# Altium PCB DCDC_POWER_SUPPLY_V2.PcbDoc (part 1 of 3)
Units mm, origin at the board's own origin, x right, y up, seen from the top; angles counter-clockwise.
Board outline 41 x 24.5 mm, 4 copper layers (Top Layer, GND 1, GND 2, Bottom Layer), stack 0.603 mm thick; 49 components, 29 nets, 141 pads, 132 vias.
Unrouted connection lines stored in the file: 1.
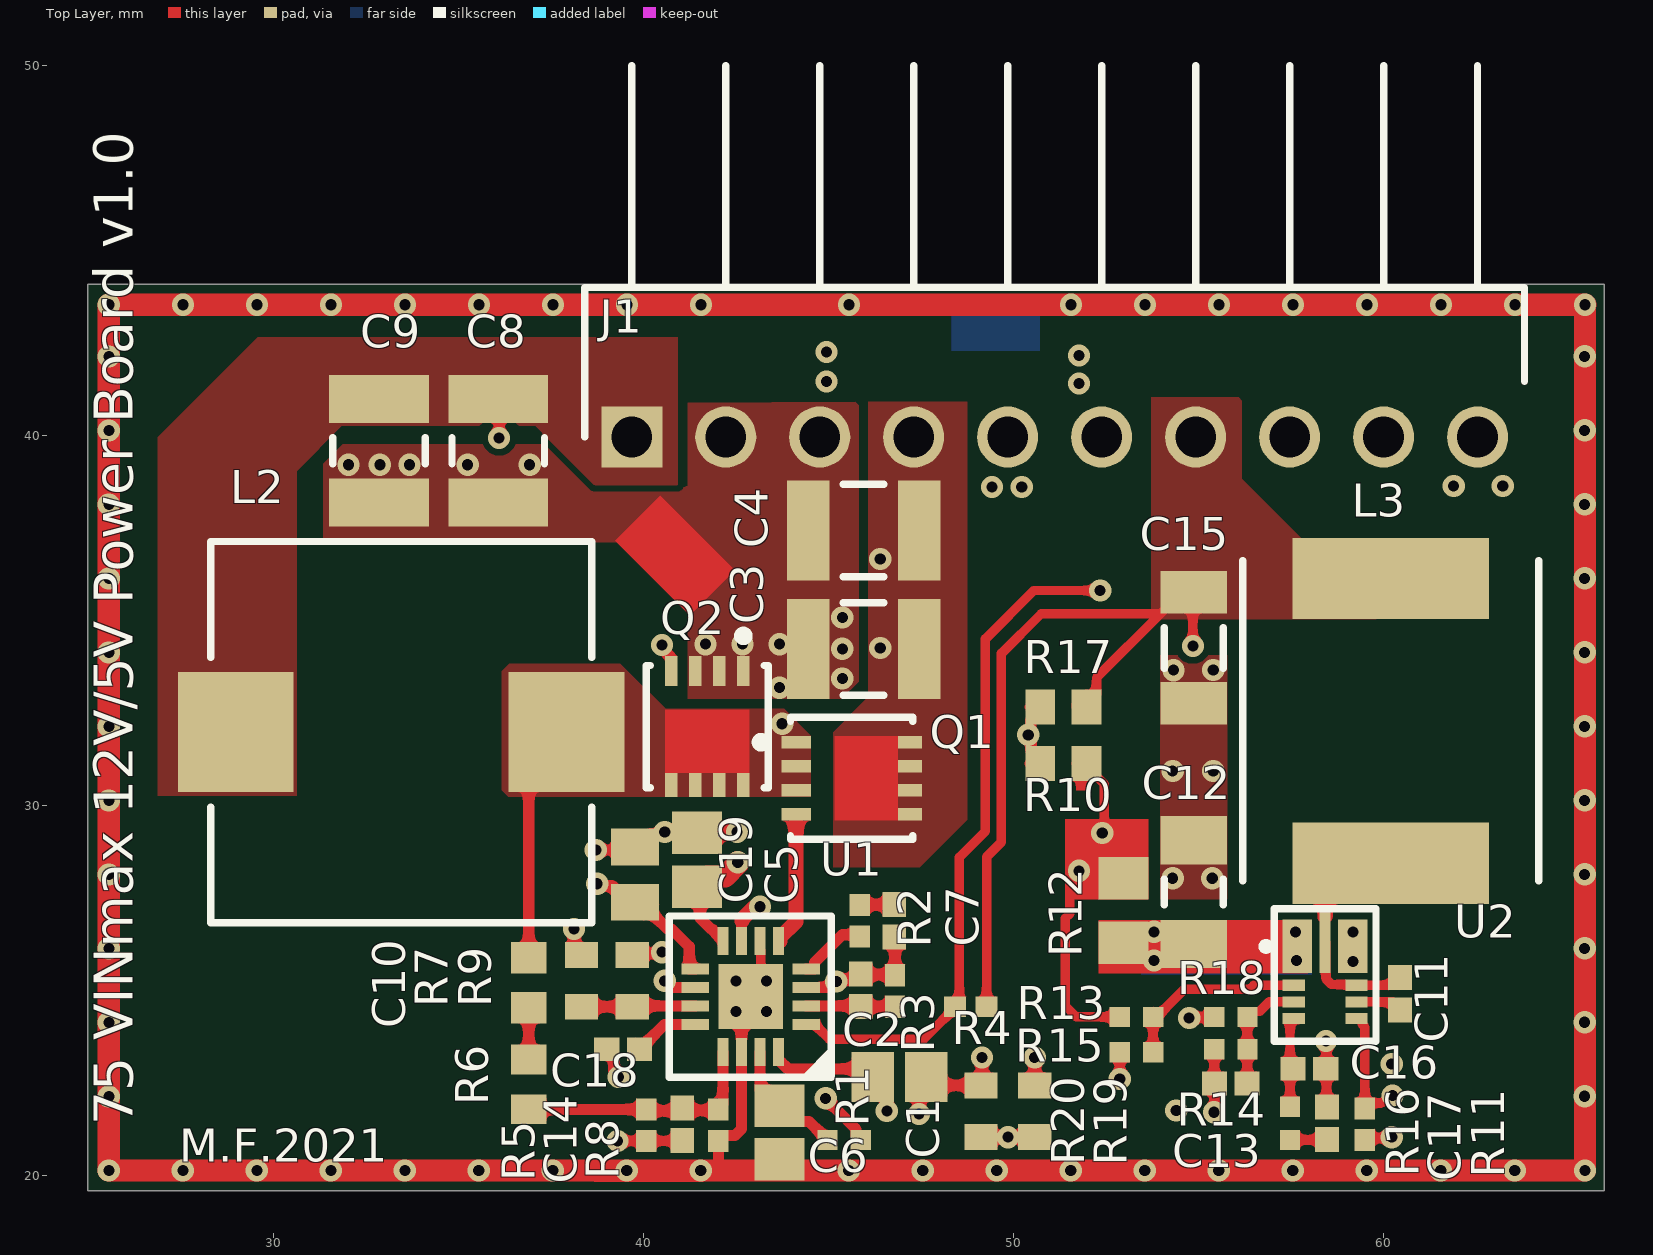
[diagram p0: Top Layer view]
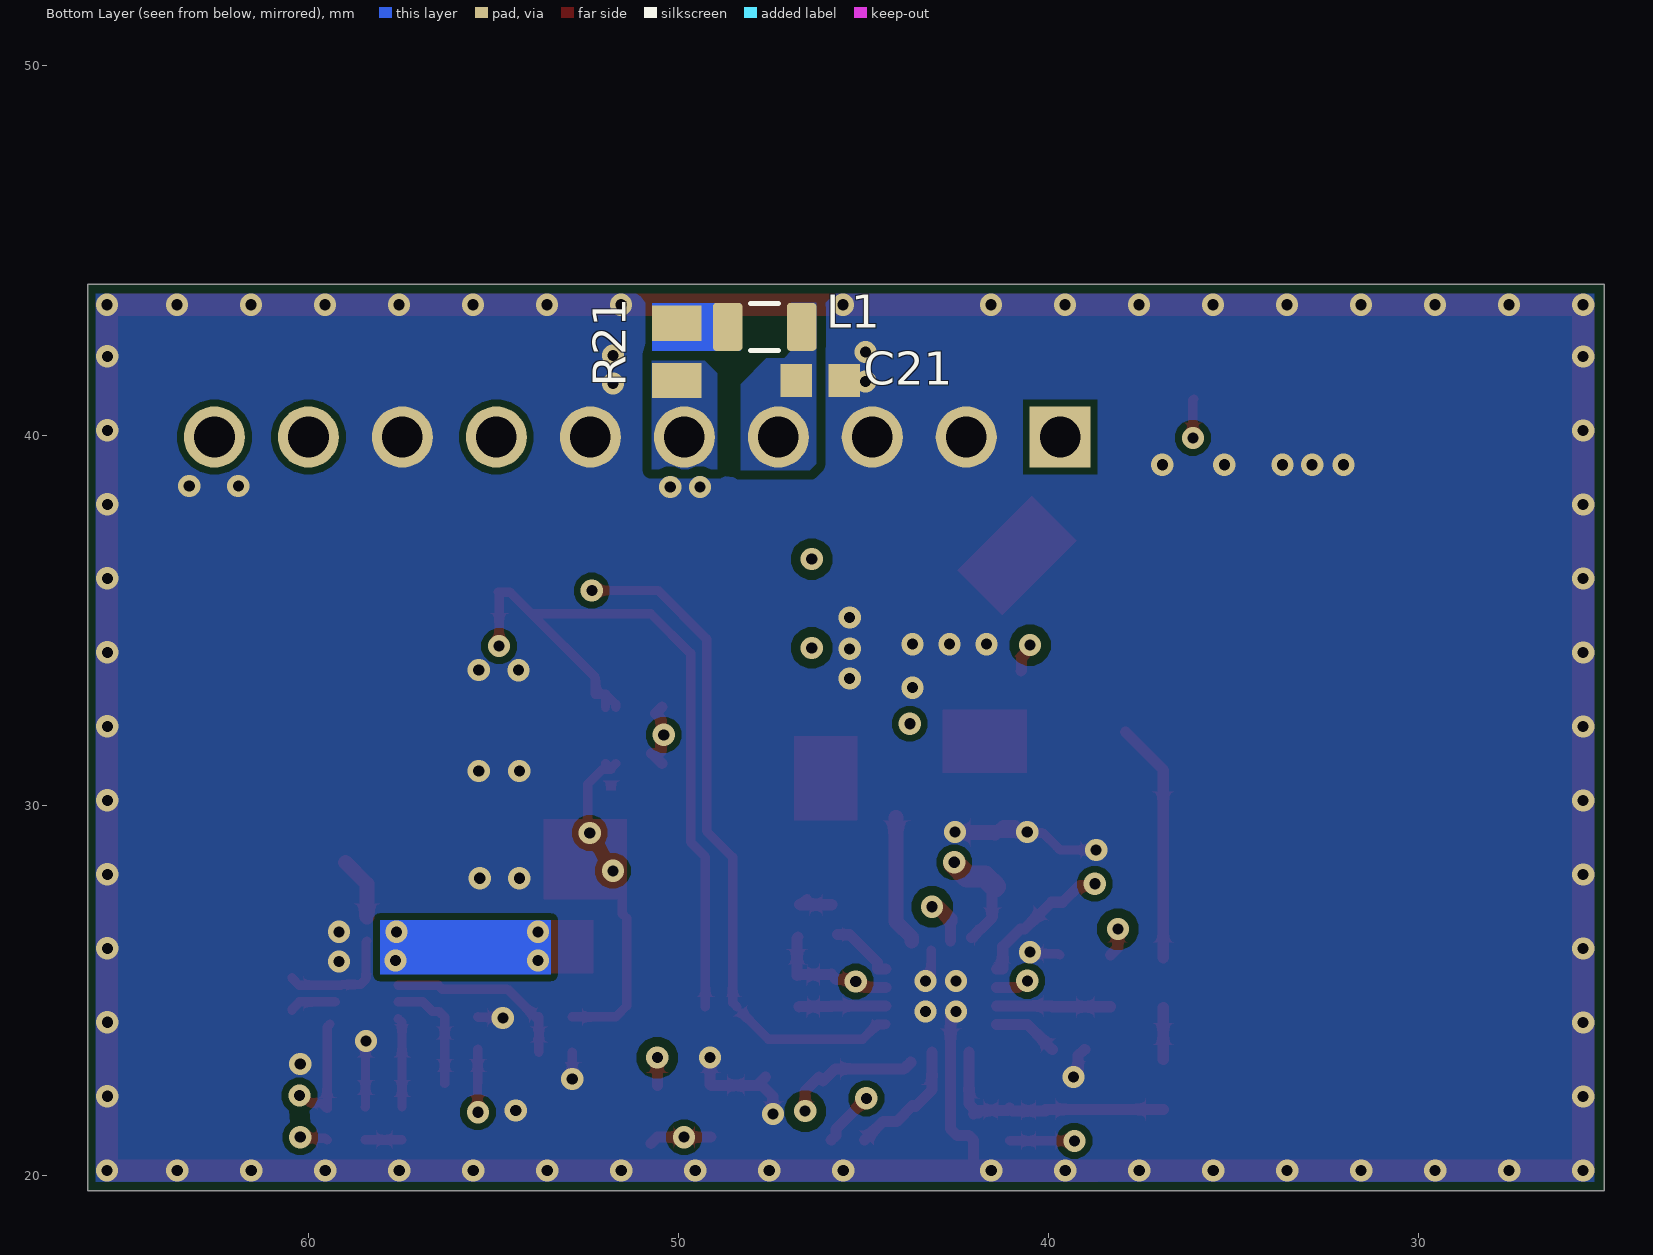
[diagram p1: Bottom Layer view, seen from below]
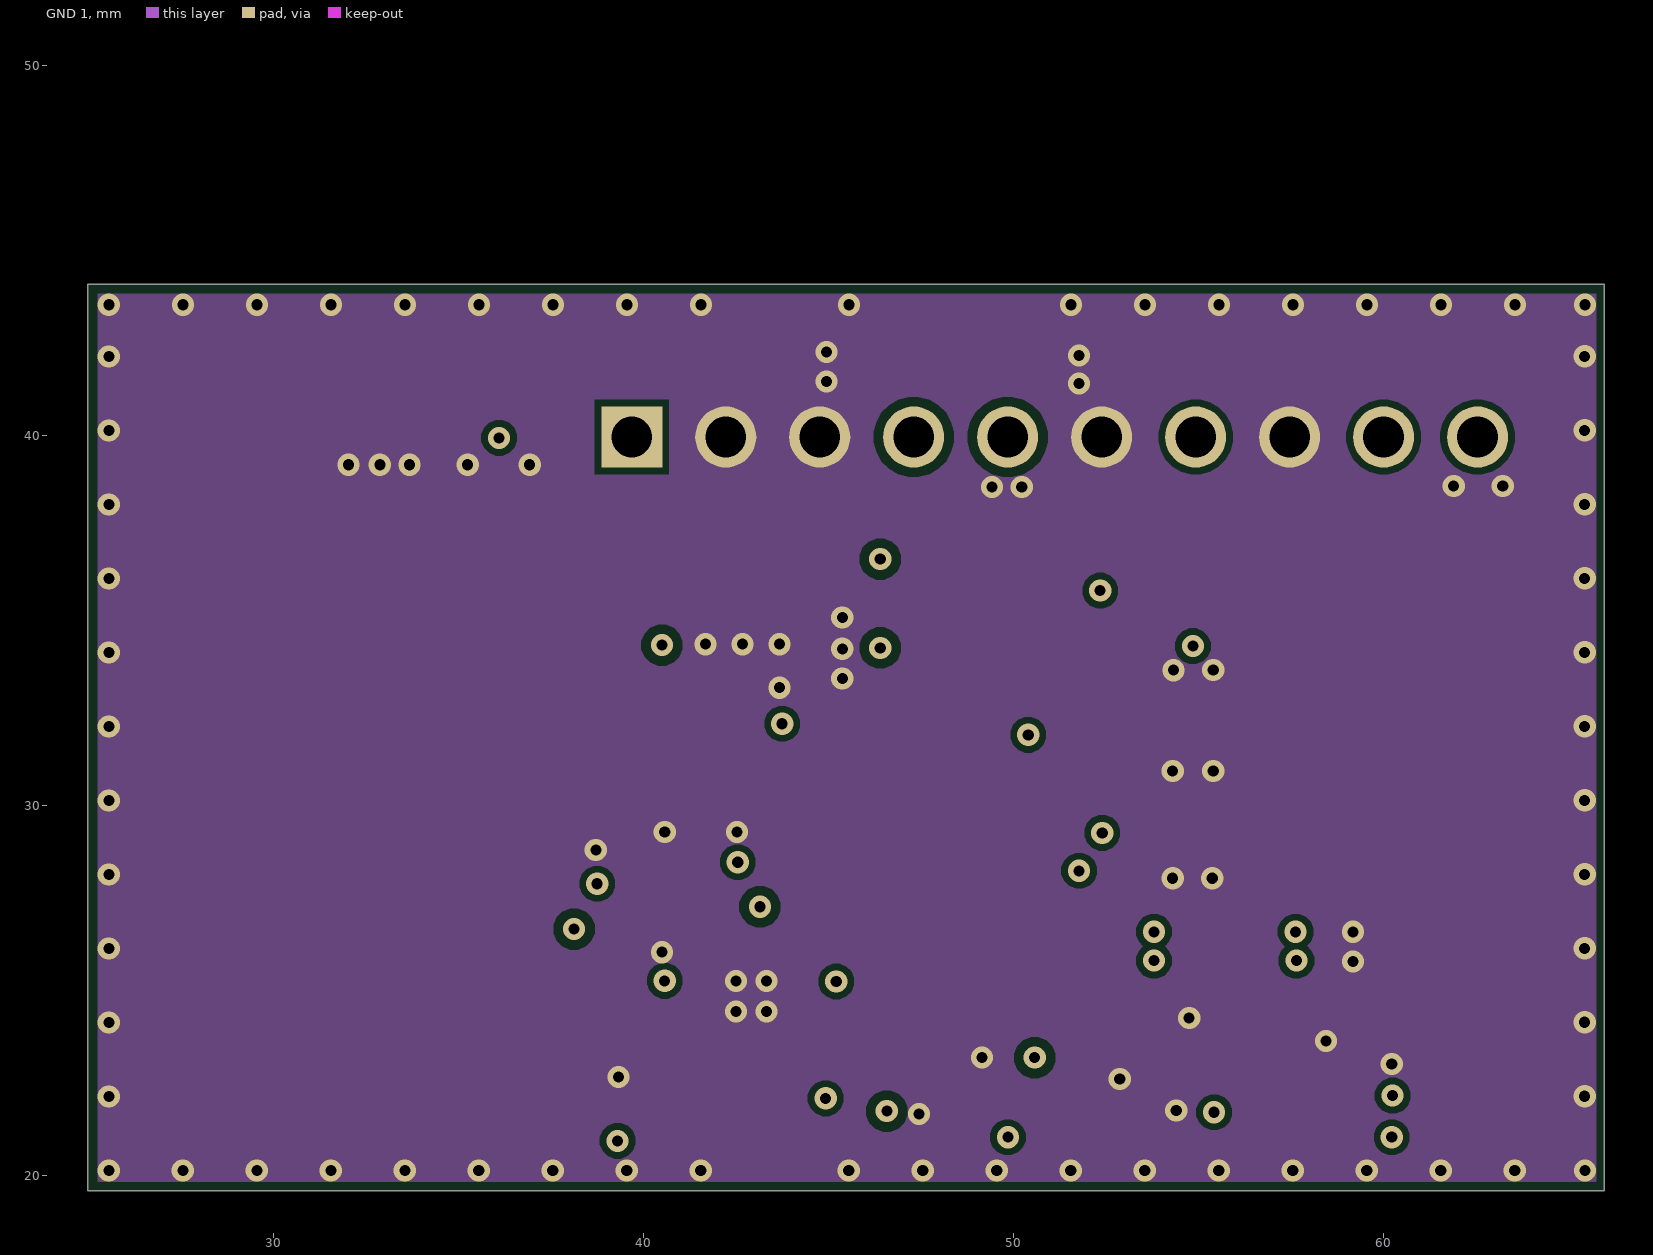
[diagram p2: GND 1]
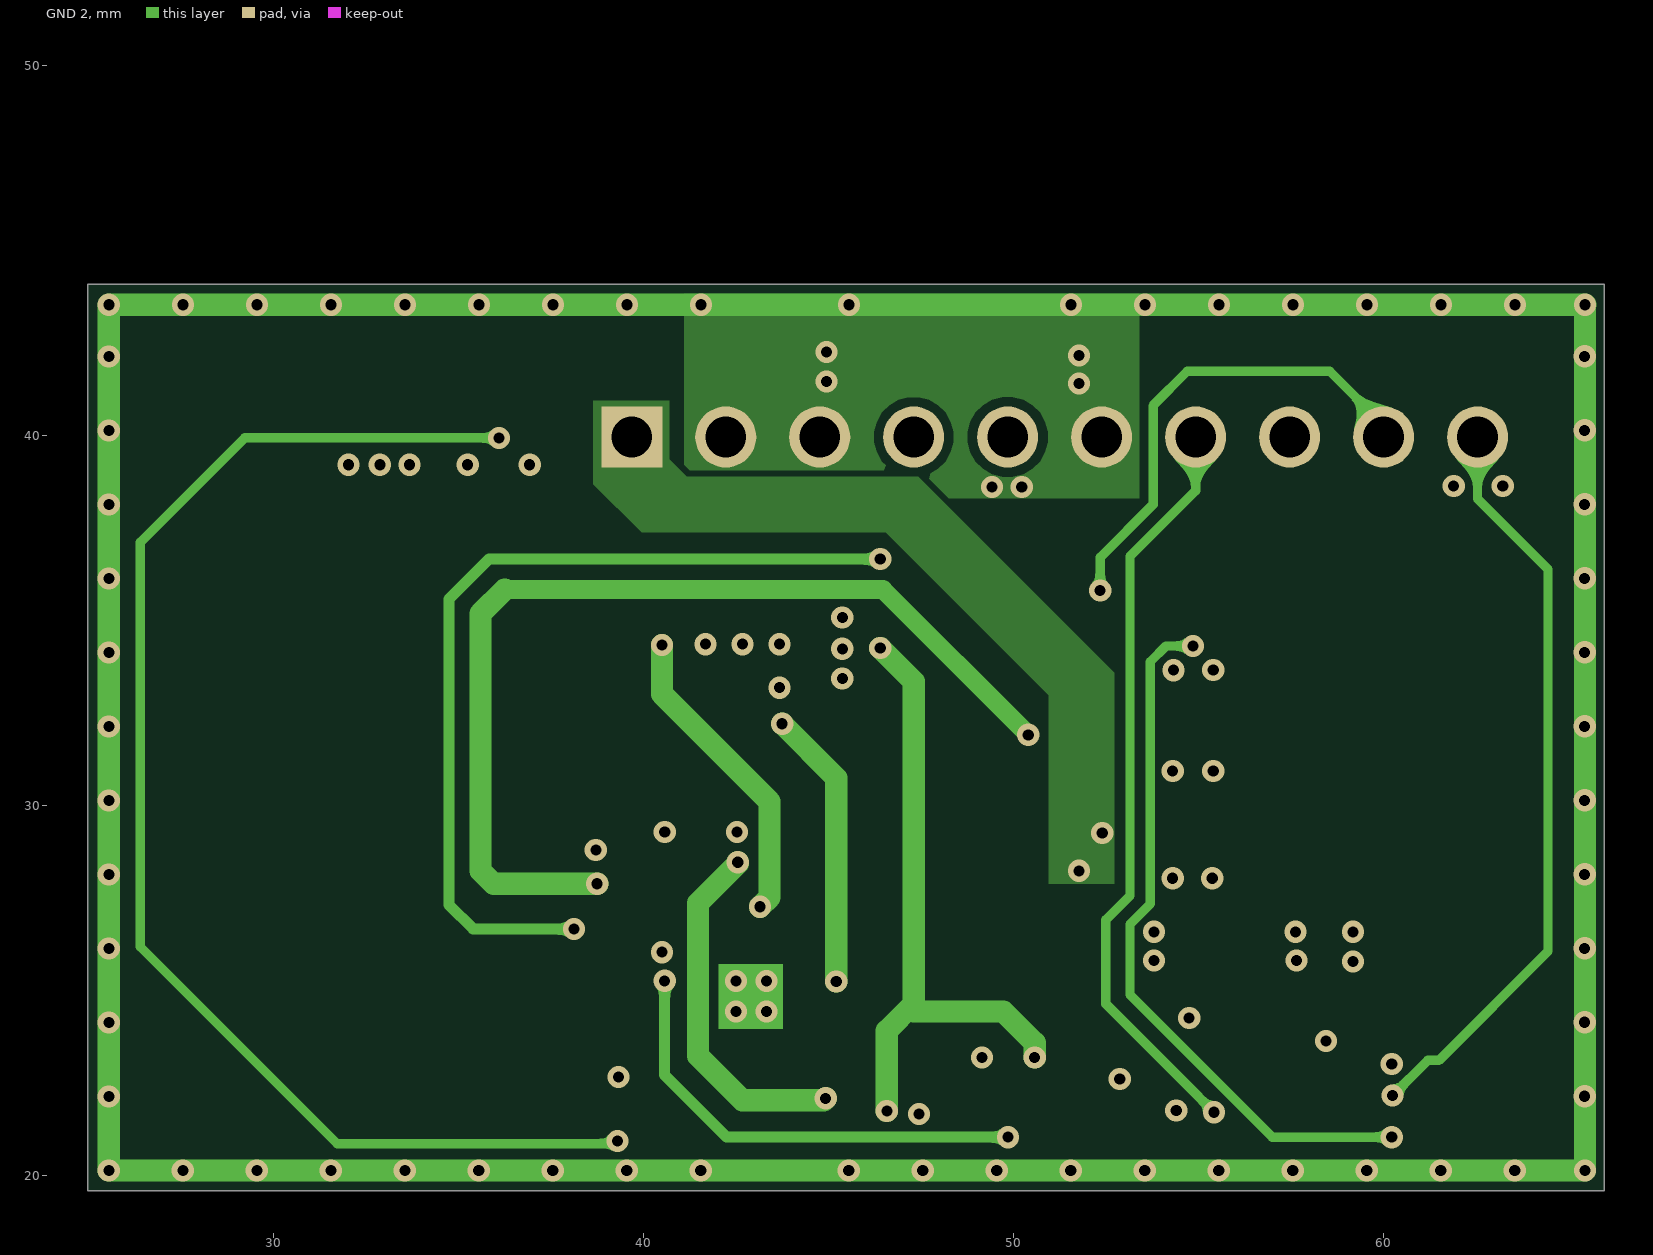
[diagram p3: GND 2]

## Layer stack, top to bottom
Top Solder: solder mask 0.0102, Solder Resist, Dk 3.5
Top Layer: signal copper 0.0356
Dielectric 2: prepreg 0.0711, PP-006, Dk 4.1
GND 1: signal copper 0.035
Dielectric 1: dielectric 0.32, FR-4, Dk 4.8
GND 2: signal copper 0.035
Dielectric 3: prepreg 0.0711, PP-006, Dk 4.1
Bottom Layer: signal copper 0.0356
Bottom Solder: solder mask 0.0102, Solder Resist, Dk 3.5

## Board outline
24.975,19.575 65.975,19.575 65.975,44.075 24.975,44.075

## Design rules (kind name [scope] priority, off if disabled: settings)
Clearance Clearance_2 [All vs InComponent('U2')] p1: gap=0.15 ignorepadtopadclearanceinfootprint=FALSE
Clearance Clearance_1 [(InNet('NetQ1_4') OR InNet('NetQ2_4') OR InNet('V_PV') OR InNet('V_PVin'))] p2: gap=0.254 ignorepadtopadclearanceinfootprint=FALSE except(0.178: Arc-SMDPad Track-SMDPad SMDPad-SMDPad)
Clearance [All] p3: gap=0.178 ignorepadtopadclearanceinfootprint=FALSE
PolygonConnect PolygonConnect_2 [(InNet('V_PVin') AND InNet('V_PV'))] p1: connectstyle=Direct reliefconductorwidth=0.254 reliefentries=4 polygonreliefangle="90 Angle" airgapwidth=0.254
PolygonConnect [All] p2: connectstyle=Direct reliefconductorwidth=0.254 reliefentries=4 polygonreliefangle="90 Angle" airgapwidth=0.254
PolygonConnect PolygonConnect_1 [OnBottomLayer] p3: thpad.connectstyle=Relief thpad.reliefconductorwidth=0.254 thpad.reliefentries=4 thpad.polygonreliefangle="90 Angle" thpad.airgapwidth=0.254 smdpad.connectstyle=Direct smdpad.reliefconductorwidth=0.254 smdpad.reliefentries=4 smdpad.polygonreliefangle="90 Angle" smdpad.airgapwidth=0.254 via.connectstyle=Direct via.reliefconductorwidth=0.254 via.reliefentries=4 via.polygonreliefangle="90 Angle" via.airgapwidth=0.254
RoutingVias [All] p1: holewidth=0.711 width=1.27 viastyle="Through Hole" minholewidth=0.3 minwidth=0.6 maxholewidth=0.711 maxwidth=1.27
SolderMaskExpansion [All] p1: expansion=0.06 istentingtop=FALSE
Width [All] p1: maxlimit=5 minlimit=0.2 preferedwidth=0.254
30 further rules are at their usual default settings.

## Classes and differential pairs
component class HV_BUCK_V2: C1 C2 C3 C4 C5 C6 C7 C8 C9 C10 C14 C18 C19 C21 J1 L1 L2 Q1 Q2 R1 R2 R3 R4 R5 R6 R7 R8 R9 R10 R17 R19 R20 R21 U1
component class LV_BUCK: C11 C12 C13 C15 C16 C17 L3 R11 R12 R13 R14 R15 R16 R18 U2

## Components (designator, comment, footprint, x,y, rotation, side; value= is the part's Value field where it differs from the comment)
C1 "10nF" CAPC2013X94X50LL20T25 46.925,22.65 r180 top
C2 "2.2nF" CAPC1005X56X25NL10T15 45.875,25 r270 top
C3 "CAP 2.2uF 100V" CAPC1210(3225)280_N 45.95,34.225 r0 top value=2.2uF
C4 "CAP 2.2uF 100V" CAPC1210(3225)280_N 45.95,37.425 r0 top value=2.2uF
C5 "4.7uF" CAPC2013X152X50LL20T25 41.45,28.525 r270 top
C6 "4.7uF" CAPC2013X152X50LL20T25 43.675,21.15 r90 top
C7 "100nF" CAPC1005X56X25NL10T15 46.775,26.875 r90 top
C8 "22uF" CAPC3225X279X50NL20T25 36.075,39.575 r90 top
C9 "22uF" CAPC3225X279X50NL20T25 32.85,39.575 r90 top
C10 "100nF" CAPC1608X90X35NL10T15 36.9,25.2 r90 top
C11 "100nF" CAPC1005X56X25NL10T15 60.45,24.9 r270 top
C12 "4.7uF" CAPC3216X180X50NL20T25 54.875,27.65 r270 top
C13 "10pF" CAPC1005X56X25NL10T15 55.875,22.475 r180 top
C14 "2.2nF" CAPC1005X56X25NL10T15 41.05,21.375 r270 top
C15 "22uF" CAPC1206(3216)190_N 54.875,34.25 r90 top
C16 "15pF" CAPC1005X56X25NL10T15 58,22.875 r180 top
C17 "10nF" CAPC1005X56X25NL10T15 58.475,21.4 r270 top
C18 "10nF" CAPC1005X56X25NL10T15 39.45,23.4 r0 top
C19 "1uF" CAPC2013X135X45LL10T25 39.775,28.125 r270 top
C21 "3.3nF" CAPC1608X90X35LL15T15 46.175,41.475 r0 bottom
J1 "61301011021" HDRRA10W64P0X254_1X10_2540X254X254P 39.685,39.95 r0 top
L1 "742792641" RESC2012X70N 47.675,42.925 r0 bottom
L2 "100uH" VISH-IHLP4040DZER101M11_V 33.45,31.975 r180 top
L3 "22uH" INDPM8680X400N 60.2,32.275 r90 top
Q1 "IAUZ20N08S5L300" INF-PG-TSDSON-8-1_V 45.625,30.725 r180 top
Q2 "IAUZ20N08S5L300" INF-PG-TSDSON-8-1_V 41.725,32.125 r90 top
R1 "2.2R" RESC1005X40X25NL05T05 45.425,20.95 r0 top
R2 "3R3" RESC1005X40X25NL05T10 45.85,26.875 r270 top
R3 "953R" RESC1005X40X25NL05T10 46.8,24.975 r270 top
R4 "100K" RESC1005X40X25NL05T10 48.85,24.55 r180 top
R5 "19.1K" RESC1005X40X25NL05T10 40.075,21.35 r270 top
R6 "180K" RESC1608X55X30NL15T15 36.9,22.45 r90 top
R7 "100K" RESC1608X55X25NL10T15 38.325,25.25 r270 top
R8 "1K" RESC1005X40X25NL05T10 42.025,21.35 r90 top
R9 "150K" RESC1608X55X25NL10T15 39.7,25.25 r270 top
R10 "2.2R" RESC1609X50X30NL10T20 51.35,31.125 r180 top
R11 "100K" RESC1005X40X25NL05T10 59.5,21.375 r270 top
R12 "4.7R" RESC2013X70X40NL20T20 52.975,27.15 r90 top
R13 "470k" RESC1005X40X25NL05T05 53.325,24.275 r180 top
R14 "158K" RESC1005X40X25NL05T05 55.875,23.4 r180 top
R15 "82k" RESC1005X40X25NL05T05 53.325,23.325 r0 top
R16 "42.2K" RESC1005X40X25NL05T05 57.475,21.4 r90 top
R17 "2.2R" RESC1609X50X30NL10T20 51.35,32.65 r180 top
R18 "30K" RESC1005X40X25NL05T05 55.875,24.275 r0 top
R19 "1M" RESC1608X55X25NL10T15 50.575,21.725 r90 top
R20 "100K" RESC1608X55X25NL10T15 49.125,21.725 r270 top
R21 "0.3R" RESC2013X50X40LL20T20 50.05,42.25 r270 bottom
U1 "MIC2128YML-TR" QFN50P300X300X90-17N 42.9,24.825 r180 top
U2 "AP63357QZV-7" AP63357QZV7 58.425,25.475 r0 top

## Footprints (in the part's own frame and the unit in brackets; to place one, negate y for a bottom-side part, rotate by r counter-clockwise, add the part's x,y. Pads: shape width x height; smd on the part's side, far side on the other; paste and mask are expansions set on the pad)
AP63357QZV7 [mm]
  rect 0.8x1.45 smd: 1(-0.75,0.707) 8(0.75,0.707)
  rect 0.6x0.3 smd: 2(-0.85,-0.344) 3(-0.85,-0.794) 4(-0.85,-1.244) 5(0.85,-1.244) 6(0.85,-0.794) 7(0.85,-0.344)
  rect 0.3x1.725 smd: 9(0,0.844)
  silkscreen extent -1.7,0.61 -1.5,0.81, body extent -1,-1.5 1,1.5, height 0.95
CAPC1005X56X25NL10T15 [mm] "Chip Capacitor, 2-Leads, Body 1.00x0.50mm, IPC Medium Density"
  rect 0.68x0.64 smd: 1(-0.44,0) 2(0.44,0)
  body extent -0.55,-0.3 0.55,0.3, height 0.56
CAPC1206(3216)190_N [mm] "Chip Capacitor, Body 3.2x1.6mm, Height 1.9mm, IPC Medium Density"
  rect 1.15x1.8 smd: 1(-1.5,0) 2(1.5,0)
  silkscreen extent -0.55,-0.8 0.55,0.8, body extent -1.7,-0.9 1.7,0.9, height 1.9
CAPC1210(3225)280_N [mm] "Chip Capacitor, Body 3.2x2.5mm, Height 2.8mm, IPC Medium Density"
  rect 1.15x2.7 smd: 1(-1.5,0) 2(1.5,0)
  silkscreen extent -0.55,-1.25 0.55,1.25, body extent -1.7,-1.4 1.7,1.4, height 2.8
CAPC1608X90X35LL15T15 [mm] "Chip Capacitor, 2-Leads, Body 1.60x0.81mm, IPC High Density"
  rect 0.85x0.9 smd: 1(-0.65,0) 2(0.65,0)
  body extent -0.88,-0.48 0.87,0.48, height 0.9
CAPC1608X90X35NL10T15 [mm] "Chip Capacitor, 2-Leads, Body 1.60x0.80mm, IPC Medium Density"
  rect 0.85x0.95 smd: 1(-0.675,0) 2(0.675,0)
  body extent -0.85,-0.45 0.85,0.45, height 0.9
CAPC2013X94X50LL20T25 [mm] "Chip Capacitor, 2-Leads, Body 2.01x1.25mm, IPC High Density"
  rect 1.15x1.35 smd: 1(-0.725,0) 2(0.725,0)
  body extent -1.1,-0.72 1.1,0.72, height 0.94
CAPC2013X135X45LL10T25 [mm] "Chip Capacitor, 2-Leads, Body 2.00x1.25mm, IPC High Density"
  rect 1x1.3 smd: 1(-0.75,0) 2(0.75,0)
  body extent -1.05,-0.67 1.05,0.68, height 1.35
CAPC2013X152X50LL20T25 [mm] "Chip Capacitor, 2-Leads, Body 2.01x1.25mm, IPC High Density"
  rect 1.15x1.35 smd: 1(-0.725,0) 2(0.725,0)
  body extent -1.1,-0.72 1.1,0.72, height 1.52
CAPC3216X180X50NL20T25 [mm] "Chip Capacitor, 2-Leads, Body 3.40x1.80mm, IPC Medium Density"
  rect 1.3x1.8 smd: 1(-1.4,0) 2(1.4,0)
  silkscreen extent -0.35,-0.8 0.35,0.8, body extent -1.7,-0.9 1.7,0.9, height 1.8
CAPC3225X279X50NL20T25 [mm] "Chip Capacitor, 2-Leads, Body 3.40x2.70mm, IPC Medium Density"
  rect 1.3x2.7 smd: 1(-1.4,0) 2(1.4,0)
  silkscreen extent -0.35,-1.25 0.35,1.25, body extent -1.7,-1.35 1.7,1.35, height 2.79
HDRRA10W64P0X254_1X10_2540X254X254P [mm]
  rect 1.65x1.65 hole 1.1: 1(0,0)
  round 1.65 hole 1.1: 2(2.54,0) 3(5.08,0) 4(7.62,0) 5(10.16,0) 6(12.7,0) 7(15.24,0) 8(17.78,0) 9(20.32,0) 10(22.86,0)
  silkscreen extent -1.27,0 24.13,10.04, body extent -1.27,-0.32 24.13,10.04, height 2.54
INDPM8680X400N [mm]
  rect 2.2x5.3 smd: 1(-3.85,0) 2(3.85,0)
  silkscreen extent -4.33,-4 4.33,4, body extent -4.33,-4 4.33,4, height 4
INF-PG-TSDSON-8-1_V [mm] "TSDSON, 8-Leads, Body 3.3x3.3mm, Pitch 0.65mm"
  rect 0.8x0.34 smd: 1(1.5,-0.975) 2(1.5,-0.325) 3(1.5,0.325) 4(1.5,0.975)
  rect 0.65x0.34 smd: 5(-1.575,0.975) 6(-1.575,0.325) 7(-1.575,-0.325) 8(-1.575,-0.975)
  Top Layer region: -1.25,-1.145 0.46,-1.145 0.46,1.145 -1.25,1.145
  silkscreen extent -1.65,-1.65 2.57,1.65, body extent -1.65,-1.65 1.65,1.65, height 1.1
QFN50P300X300X90-17N [mm]
  rect 0.75x0.3 smd: 1(-1.5,0.75) 2(-1.5,0.25) 3(-1.5,-0.25) 4(-1.5,-0.75) 9(1.5,-0.75) 10(1.5,-0.25) 11(1.5,0.25) 12(1.5,0.75)
  rect 0.3x0.75 smd: 5(-0.75,-1.5) 6(-0.25,-1.5) 7(0.25,-1.5) 8(0.75,-1.5) 13(0.75,1.5) 14(0.25,1.5) 15(-0.25,1.5) 16(-0.75,1.5)
  rect 1.75x1.75 smd: 17(0,0)
  silkscreen extent -2.18,-2.18 2.2,2.18, body extent -1.55,-1.55 1.55,1.55, height 0.9
RESC1005X40X25NL05T05 [mm] "Chip Resistor, 2-Leads, Body 1.00x0.50mm, IPC Medium Density"
  rect 0.55x0.55 smd: 1(-0.45,0) 2(0.45,0)
  body extent -0.53,-0.27 0.53,0.28, height 0.4
RESC1005X40X25NL05T10 [mm] "Chip Resistor, 2-Leads, Body 1.00x0.50mm, IPC Medium Density"
  rect 0.6x0.55 smd: 1(-0.425,0) 2(0.425,0)
  body extent -0.53,-0.27 0.53,0.28, height 0.4
RESC1608X55X25NL10T15 [mm] "Chip Resistor, 2-Leads, Body 1.70x0.90mm, IPC Medium Density"
  rect 0.7x0.9 smd: 1(-0.7,0) 2(0.7,0)
  body extent -0.85,-0.45 0.85,0.45, height 0.55
RESC1608X55X30NL15T15 [mm] "Chip Resistor, 2-Leads, Body 1.60x0.80mm, IPC Medium Density"
  rect 0.8x0.95 smd: 1(-0.675,0) 2(0.675,0)
  body extent -0.87,-0.48 0.87,0.48, height 0.55
RESC1609X50X30NL10T20 [mm] "Chip Resistor, 2-Leads, Body 1.55x0.85mm, IPC Medium Density"
  rect 0.8x0.95 smd: 1(-0.625,0) 2(0.625,0)
  body extent -0.82,-0.48 0.82,0.48, height 0.5
RESC2012X70N [mm] "Chip Resistor, Body 2.0x1.2mm, EIA 0805, IPC Medium Density"
  round 0.254 on Mech15: 0(0,0)
  rrect25% 0.8x1.3 smd: 1(-1,0) 2(1,0)
  Top Layer pour cut-out: -0.725,0.65 -0.525,0.85 0.525,0.85 0.725,0.65 0.725,-0.65 0.525,-0.85 -0.525,-0.85 -0.725,-0.65
  silkscreen extent -0.38,-0.64 0.38,0.64, body extent -1.1,-0.67 1.1,0.68, height 0.69
RESC2013X50X40LL20T20 [mm] "Chip Resistor, 2-Leads, Body 2.00x1.25mm, IPC High Density"
  rect 0.95x1.35 smd: 1(-0.775,0) 2(0.775,0)
  body extent -1.1,-0.72 1.1,0.72, height 0.5
RESC2013X70X40NL20T20 [mm] "Chip Resistor, 2-Leads, Body 2.2x1.35mm, IPC Medium Density"
  rect 1.15x1.35 smd: 1(-0.875,0) 2(0.875,0)
  body extent -1.1,-0.67 1.1,0.67, height 0.7
VISH-IHLP4040DZER101M11_V [mm] "Molded Inductor, 2-Leads, Body 10.30x10.30mm"
  rect 3.124x3.251 smd: 1(-4.47,0) 2(4.471,0)
  silkscreen extent -5.15,-5.15 5.15,5.15, body extent -5.37,-5.15 5.37,5.15, height 4

## Part data
C1: library part CMP-2007-04169-1, "Cap Ceramic 0.01uF 100V X7R 10% SMD 0805 FlexiTerm 125C Paper T/R", Case Code (Imperial)=0805, Case Code (Metric)=2012, Dielectric=X7R, Manufacturer="AVX Interconnect / Elco", Manufacturer Part Number=08051C103KAZ2A, Max Operating Temperature=125°C, Min Operating Temperature=-55°C, Package Quantity=1, Supplier Part Number 1=478-3559-1-ND, Temperature coefficient=30ppm/°C, Tolerance=10%, Voltage=100V, Capacitance=10nF, Case/Package=0805, Category="Ceramic Capacitors", ComponentLink1Description=https://datasheet.ciiva.com/26904/getdatasheetpartid-136837-26904192.pdf?src-supplier=Verical, ComponentLink1URL=https://datasheet.ciiva.com/26904/getdatasheetpartid-136837-26904192.pdf?src-supplier=Verical, ComponentLink2Description=https://datasheet.ciiva.com/11787/0900766b80dc2409-11787665.pdf?src-supplier=RSComponents, ComponentLink2URL=https://datasheet.ciiva.com/11787/0900766b80dc2409-11787665.pdf?src-supplier=RSComponents, ComponentLink3Description=https://datasheet.ciiva.com/151/flexiterm-151492.pdf?src-supplier=Digi-Key, ComponentLink3URL=https://datasheet.ciiva.com/151/flexiterm-151492.pdf?src-supplier=Digi-Key, ComponentLink4Description=https://datasheet.ciiva.com/151/flexiterm-151493.pdf?src-supplier=Digi-Key, ComponentLink4URL=https://datasheet.ciiva.com/151/flexiterm-151493.pdf?src-supplier=Digi-Key, ComponentLink5Description=https://datasheet.ciiva.com/16326/cx7r-16326741.pdf?src-supplier=Future+Electronics, ComponentLink5URL=https://datasheet.ciiva.com/16326/cx7r-16326741.pdf?src-supplier=Future+Electronics, ComponentLink6Description=https://datasheet.ciiva.com/151/flexiterm-151494.pdf?src-supplier=Digi-Key, ComponentLink6URL=https://datasheet.ciiva.com/151/flexiterm-151494.pdf?src-supplier=Digi-Key, ComponentLink7Description=https://datasheet.ciiva.com/16625/flexiterm-16625227.pdf?src-supplier=Avnet+Europe, ComponentLink7URL=https://datasheet.ciiva.com/16625/flexiterm-16625227.pdf?src-supplier=Avnet+Europe, ComponentLink8Description=https://datasheet.ciiva.com/11508/flexiterm-11508220.pdf?src-supplier=Avnet, ComponentLink8URL=https://datasheet.ciiva.com/11508/flexiterm-11508220.pdf?src-supplier=Avnet, ComponentLink9Description=https://datasheet.ciiva.com/5416/cx7r-218113-5416686.pdf?src-supplier=Mouser, ComponentLink9URL=https://datasheet.ciiva.com/5416/cx7r-218113-5416686.pdf?src-supplier=Mouser, Construction=Flat, Depth=1.25mm, Dissipation Factor=2.5%, Features="Soft Termination", Height=0.94mm, Lead Free="Lead Free", Length=2.01mm, Mount="Surface Mount", Number of Pins=2, Packaging="Tape and Reel", Part Number=08051C103KAZ2A, Pricing 1="1=0.27000, 10=0.18200, 50=0.10880, 100=0.09200, 500=0.06292, 1000=0.05566 (USD)", Radiation Hardening=No, REACH SVHC="No SVHC", RoHS=Yes, RoHS Compliant=Yes, Series=FLEXITERM®, Stock 1=40, Supplier 1=Digi-Key, Termination=SMD/SMT, Thickness=0.037inch, Voltage Rating=100V, Voltage Rating (DC)=100V, Width=0.049inch
C2 C14: library part CMP-2008-02907-1, Case Code (Imperial)=0402, Case Code (Metric)=1005, Dielectric=X7R, Dielectric Material=Ceramic, Insulation Resistance=100GR, Manufacturer="AVX Interconnect / Elco", Manufacturer Part Number=04025C222JAT2A, Max Operating Temperature=125°C, Min Operating Temperature=-55°C, Package Quantity=1, Supplier Part Number 1=478-5131-1-ND, Tolerance=5%, Voltage=50V, Capacitance=2.2nF, Case/Package=0402, Category="Ceramic Capacitors", ComponentLink1Description=https://datasheet.ciiva.com/1123/1679506-1123714.pdf?src-supplier=Element14, ComponentLink1URL=https://datasheet.ciiva.com/1123/1679506-1123714.pdf?src-supplier=Element14, ComponentLink2Description=https://datasheet.ciiva.com/152/cx7r-152323.pdf?src-supplier=Digi-Key, ComponentLink2URL=https://datasheet.ciiva.com/152/cx7r-152323.pdf?src-supplier=Digi-Key, ComponentLink3Description=https://datasheet.ciiva.com/1123/1679506-1123715.pdf?src-supplier=Element14, ComponentLink3URL=https://datasheet.ciiva.com/1123/1679506-1123715.pdf?src-supplier=Element14, ComponentLink4Description=https://datasheet.ciiva.com/152/cx7r-152324.pdf?src-supplier=Digi-Key, ComponentLink4URL=https://datasheet.ciiva.com/152/cx7r-152324.pdf?src-supplier=Digi-Key, ComponentLink5Description=https://datasheet.ciiva.com/152/cx7r-152325.pdf?src-supplier=Digi-Key, ComponentLink5URL=https://datasheet.ciiva.com/152/cx7r-152325.pdf?src-supplier=Digi-Key, ComponentLink6Description=https://datasheet.ciiva.com/7709/1679506-7709551.pdf?src-supplier=Element14, ComponentLink6URL=https://datasheet.ciiva.com/7709/1679506-7709551.pdf?src-supplier=Element14, Contact Plating=Tin,Matte, Depth=0.5mm, Dissipation Factor=10%, Height=0.56mm, Lead Free="Lead Free", Length=1mm, Mount="Surface Mount,PCB", Packaging="Tape and Reel", Part Number=04025C222JAT2A, Pricing 1="1=0.38000, 10=0.26200, 50=0.17480, 100=0.14860, 500=0.10488, 1000=0.09177, 2500=0.08740, 5000=0.08084 (USD)", Radiation Hardening=No, REACH SVHC="No SVHC", RoHS=Yes, RoHS Compliant=Yes, Stock 1=9857, Supplier 1=Digi-Key, Termination=SMD/SMT, Thickness=0.022inch, Voltage Rating=50V, Voltage Rating (DC)=50V, Width=0.02inch
C3 C4: library part CMP-1038-02104-1, "CAP 2.2uF 100V ±10% 1210 (3225 Metric) Thickness 2.8mm SMD", Case-EIA=1210, Case-Metric=3225, Rated Voltage="100 V", Tolerance=Â±10%, Max Thickness="2.8 mm", Technology=SMT
C5 C6: library part CMP-2007-04518-1, "Cap Ceramic 4.7uF 16V X7R 10% SMD 0805 125C Embossed T/R", Case Code (Imperial)=0805, Case Code (Metric)=2012, Dielectric=X7R, Manufacturer="AVX Interconnect / Elco", Manufacturer Part Number=0805YC475KAT2A, Max Operating Temperature=125°C, Min Operating Temperature=-55°C, Package Quantity=1, Supplier Part Number 1=478-5722-1-ND, Tolerance=10%, Voltage=10V, Voltage Rating=16V, Capacitance=4.7uF, Case/Package=0805, Category="Ceramic Capacitors", ComponentLink1Description=https://datasheet.ciiva.com/11787/0900766b80dc2409-11787157.pdf?src-supplier=RSComponents, ComponentLink1URL=https://datasheet.ciiva.com/11787/0900766b80dc2409-11787157.pdf?src-supplier=RSComponents, ComponentLink2Description=https://datasheet.ciiva.com/154/cx7r-154080.pdf?src-supplier=Digi-Key, ComponentLink2URL=https://datasheet.ciiva.com/154/cx7r-154080.pdf?src-supplier=Digi-Key, ComponentLink3Description=https://datasheet.ciiva.com/154/cx7r-154081.pdf?src-supplier=Digi-Key, ComponentLink3URL=https://datasheet.ciiva.com/154/cx7r-154081.pdf?src-supplier=Digi-Key, ComponentLink4Description=https://datasheet.ciiva.com/7812/cx7r-7812213.pdf?src-supplier=Element14, ComponentLink4URL=https://datasheet.ciiva.com/7812/cx7r-7812213.pdf?src-supplier=Element14, ComponentLink5Description=https://datasheet.ciiva.com/7812/cx7r-7812214.pdf?src-supplier=Element14, ComponentLink5URL=https://datasheet.ciiva.com/7812/cx7r-7812214.pdf?src-supplier=Element14, ComponentLink6Description=https://datasheet.ciiva.com/5414/cx7r-218113-5414810.pdf?src-supplier=Mouser, ComponentLink6URL=https://datasheet.ciiva.com/5414/cx7r-218113-5414810.pdf?src-supplier=Mouser, ComponentLink7Description=https://datasheet.ciiva.com/2988/cx7r-2988060.pdf?src-supplier=Avnet, ComponentLink7URL=https://datasheet.ciiva.com/2988/cx7r-2988060.pdf?src-supplier=Avnet, ComponentLink8Description=https://datasheet.ciiva.com/16389/cx7r-16389021.pdf?src-supplier=Future+Electronics, ComponentLink8URL=https://datasheet.ciiva.com/16389/cx7r-16389021.pdf?src-supplier=Future+Electronics, ComponentLink9Description=https://datasheet.ciiva.com/154/cx7r-154079.pdf?src-supplier=Digi-Key, ComponentLink9URL=https://datasheet.ciiva.com/154/cx7r-154079.pdf?src-supplier=Digi-Key, ComponentLink10Description=https://datasheet.ciiva.com/11570/cx7r-11570847.pdf?src-supplier=Avnet, ComponentLink10URL=https://datasheet.ciiva.com/11570/cx7r-11570847.pdf?src-supplier=Avnet, Construction=Flat, Contact Plating=Tin,Matte, Depth=1.25mm, Dissipation Factor=3.5%, Height=1.52mm, Lead Free="Lead Free", Length=2.01mm, Mount="Surface Mount", Number of Pins=2, Packaging="Tape and Reel", Part Number=0805YC475KAT2A, Pricing 1="1=0.48000, 10=0.33000, 50=0.23100, 100=0.19800, 500=0.14850, 1000=0.12540 (USD)", Radiation Hardening=No, REACH SVHC="No SVHC", RoHS=Yes, RoHS Compliant=Yes, Series=-, Stock 1=86922, Supplier 1=Digi-Key, Termination=SMD/SMT, Thickness=0.06inch, Voltage Rating (DC)=16V, Width=0.049inch
C7 C11: library part CMP-2008-02800-1, "AVX 0.1uF Multilayer Ceramic Capacitor (MLCC) 16 V dc 10% X7R dielectric 402 SMT max op. temp. +125C", Case Code (Imperial)=0402, Case Code (Metric)=1005, Dielectric=X7R, Dielectric Material=Ceramic, Manufacturer="AVX Interconnect / Elco", Manufacturer Part Number=0402YC104KAT2A, Max Operating Temperature=125°C, Min Operating Temperature=-55°C, Package Quantity=1, Supplier Part Number 1=478-7888-1-ND, Tolerance=10%, Voltage=16V, Capacitance=100nF, Case/Package=0402, Category="Ceramic Capacitors", ComponentLink1Description=https://datasheet.ciiva.com/1123/1679506-1123956.pdf?src-supplier=Element14, ComponentLink1URL=https://datasheet.ciiva.com/1123/1679506-1123956.pdf?src-supplier=Element14, ComponentLink2Description=https://datasheet.ciiva.com/7614/cx7r-7614662.pdf?src-supplier=Digi-Key, ComponentLink2URL=https://datasheet.ciiva.com/7614/cx7r-7614662.pdf?src-supplier=Digi-Key, ComponentLink3Description=https://datasheet.ciiva.com/22693/1679506-22693578.pdf?src-supplier=Element14, ComponentLink3URL=https://datasheet.ciiva.com/22693/1679506-22693578.pdf?src-supplier=Element14, ComponentLink4Description=https://datasheet.ciiva.com/16623/cx7r-16623291.pdf?src-supplier=Avnet+Europe, ComponentLink4URL=https://datasheet.ciiva.com/16623/cx7r-16623291.pdf?src-supplier=Avnet+Europe, ComponentLink5Description=https://datasheet.ciiva.com/2987/cx7r-2987708.pdf?src-supplier=Avnet, ComponentLink5URL=https://datasheet.ciiva.com/2987/cx7r-2987708.pdf?src-supplier=Avnet, ComponentLink6Description=https://datasheet.ciiva.com/6265/cx7r-6265276.pdf?src-supplier=Digi-Key, ComponentLink6URL=https://datasheet.ciiva.com/6265/cx7r-6265276.pdf?src-supplier=Digi-Key, ComponentLink7Description=https://datasheet.ciiva.com/28613/1679506-28613260.pdf?src-supplier=Element14, ComponentLink7URL=https://datasheet.ciiva.com/28613/1679506-28613260.pdf?src-supplier=Element14, ComponentLink8Description=https://datasheet.ciiva.com/5411/cx7r-218113-5411197.pdf?src-supplier=Mouser, ComponentLink8URL=https://datasheet.ciiva.com/5411/cx7r-218113-5411197.pdf?src-supplier=Mouser, ComponentLink9Description=https://datasheet.ciiva.com/7709/1679506-7709566.pdf?src-supplier=Element14, ComponentLink9URL=https://datasheet.ciiva.com/7709/1679506-7709566.pdf?src-supplier=Element14, Construction=Flat, Contact Plating=Tin,Matte, Depth=0.5mm, Height=0.56mm, Lead Free="Lead Free", Length=1mm, Mount="Surface Mount,PCB", Packaging="Tape and Reel", Part Number=0402YC104KAT2A, Pricing 1="1=0.10000, 10=0.01600, 50=0.00860, 100=0.00700, 500=0.00500, 1000=0.00393, 2500=0.00358, 5000=0.00329 (USD)", Radiation Hardening=No, REACH SVHC=Unknown, RoHS=Yes, RoHS Compliant=Yes, Series=-, Stock 1=72315, Supplier 1=Digi-Key, Termination=SMD/SMT, Thickness=0.022inch, Voltage Rating=16V, Voltage Rating (DC)=16V, Width=0.02inch
C8 C9: library part CMP-2000-05478-1, "Ceramic Capacitor, 25 V, 22 uF, +/-10%, -55 to 85 degC, 2-Pin SMD (1210), RoHS, Tape and Reel", Case Code - in=1210, Case Code - mm=3225, Case Height=2.79mm, Case Length=3.2mm, Case Width=2.5mm, Dielectric=X5R, Manufacturer=AVX, Maximum Operating Temperature=+85C, Minimum Operating Temperature=-55C, Operating Temperature Range=-55Cto+85C, Package / Case=1210(3225metric), Package Description="2-Pin Surface Mount Device, Body 3.2 x 2.5 mm", Temperature Coefficient / Code=+/-15%, Tolerance=10%, Voltage Rating=25V, Brand=AVX, Capacitance=22uF, Datasheet URL=http://datasheets.avx.com/cx5r.pdf, Datasheet Version=05/2016, Dimensions=2.5mmWx3.2mmLx2.79mmH, Factory Pack Quantity=1000, Manufacturer URL=http://www.avx.com/, Mounting Technology=SurfaceMount, Package Reference=1210, Packaging=Reel, Product=GeneralTypeMLCCs, Product Category=MultilayerCeramicCapacitorsMLCC-SMD/SMT, RoHS=Details, Termination Style=SMD/SMT, Type=StandardX5RMLCCs, Voltage Rating DC=25V
C10: library part CMP-2006-02394-1, Case Code (Imperial)=0603, Case Code (Metric)=1608, Dielectric=X7R, Manufacturer=Murata, Manufacturer Part Number=GCM188R72A104KA64D, Max Operating Temperature=125°C, Min Operating Temperature=-55°C, Tolerance=10%, Voltage Rating=100V, Capacitance=100nF, Case/Package=0603, Category="Ceramic Capacitors", ComponentLink1Description=https://datasheet.ciiva.com/17451/product-17451047.pdf?src-supplier=Avnet+Europe, ComponentLink1URL=https://datasheet.ciiva.com/17451/product-17451047.pdf?src-supplier=Avnet+Europe, ComponentLink2Description=https://datasheet.ciiva.com/26889/getdatasheetpartid-387765-26889164.pdf?src-supplier=Verical, ComponentLink2URL=https://datasheet.ciiva.com/26889/getdatasheetpartid-387765-26889164.pdf?src-supplier=Verical, Depth=0.8mm, Height=0.8mm, Length=1.6mm, Mount="Surface Mount", Packaging="Tape and Reel", Part Number=GCM188R72A104KA64D, Radiation Hardening=No, RoHS=Yes, Supplier 1="Arrow Electronics", Supplier Part Number 1=GCM188R72A104KA64D, Termination=SMD/SMT, Voltage Rating (DC)=100V
C12: library part CMP-2000-07581-1, "Chip Capacitor, 4.7 uF, +/- 10%, 50 V, -55 to 125 degC, 1206 (3216 Metric), RoHS, Tape and Reel", Case Code (Imperial)=1206, Case Code (Metric)=3216, Dielectric=X7R, Manufacturer=AVX, Manufacturer Part Number=12065C475KAT2A, Max Operating Temperature=125degC, Min Operating Temperature=-55degC, Package Description="2-Pin Surface Mount Device, Body 3.2 x 1.6 mm", Package Quantity=1, Supplier Part Number 1=478-6653-1-ND, Tolerance=10%, Voltage Rating=50V, Capacitance=4.7uF, Case/Package=1206, Case\/Package=1206, Category="Ceramic Capacitors", ComponentLink1Description=https://datasheet.ciiva.com/5410/cx7r-218113-5410549.pdf?src-supplier=Mouser, ComponentLink1URL=https://datasheet.ciiva.com/5410/cx7r-218113-5410549.pdf?src-supplier=Mouser, ComponentLink2Description=https://datasheet.ciiva.com/16387/flexiterm-16387141.pdf?src-supplier=Future+Electronics, ComponentLink2URL=https://datasheet.ciiva.com/16387/flexiterm-16387141.pdf?src-supplier=Future+Electronics, ComponentLink3Description=https://datasheet.ciiva.com/153/cx7r-153750.pdf?src-supplier=Digi-Key, ComponentLink3URL=https://datasheet.ciiva.com/153/cx7r-153750.pdf?src-supplier=Digi-Key, ComponentLink4Description=https://datasheet.ciiva.com/7833/cx7r-7833462.pdf?src-supplier=Element14, ComponentLink4URL=https://datasheet.ciiva.com/7833/cx7r-7833462.pdf?src-supplier=Element14, ComponentLink5Description=https://datasheet.ciiva.com/153/cx7r-153751.pdf?src-supplier=Digi-Key, ComponentLink5URL=https://datasheet.ciiva.com/153/cx7r-153751.pdf?src-supplier=Digi-Key, ComponentLink6Description=https://datasheet.ciiva.com/7833/cx7r-7833463.pdf?src-supplier=Element14, ComponentLink6URL=https://datasheet.ciiva.com/7833/cx7r-7833463.pdf?src-supplier=Element14, ComponentLink7Description=https://datasheet.ciiva.com/153/cx7r-153752.pdf?src-supplier=Digi-Key, ComponentLink7URL=https://datasheet.ciiva.com/153/cx7r-153752.pdf?src-supplier=Digi-Key, Contact Plating=Matte, Datasheet URL=http://datasheets.avx.com/X7RDielectric.pdf, Datasheet Version=03/2017, Depth=1.6mm, Dissipation Factor=2.5%, Lead Free=LeadFree, Length=3.2mm, Manufacturer URL=http://www.avx.com/, Mount=SurfaceMount, Mounting Technology=SurfaceMount, Package Reference=1206, Packaging=TapeandReel, Pricing 1="1=0.51000, 10=0.35400, 100=0.21250, 500=0.15940, 1000=0.13460 (USD)", Radiation Hardening=No, REACH SVHC=NoSVHC, RoHS=Yes, RoHSCompliant=True, Stock 1=241833, Supplier 1=Digi-Key, Termination=SMD/SMT, Thickness=0.07inch, Voltage Rating (DC)=50V, Width=1.6mm
C13: library part CMP-2008-02563-1, "CERAMIC CAPACITOR, 10PF, 50V, C0G, 5%, SMD, FULL REEL; Product Range:-; Capacitance:10pF; Capacitance Tolerance: 5%; Dielectric Characteristic:C0G / NP0; Voltage Rating:50V; Ceramic Capacitor Case:0402 [1005 Metric]; No. of Pins:2 ;RoHS Compliant: Yes", Case Code (Imperial)=0402, Case Code (Metric)=1005, Dielectric=C0G, Dielectric Material=Ceramic, Manufacturer="AVX Interconnect / Elco", Manufacturer Part Number=04025A100DAT2A, Max Operating Temperature=125°C, Min Operating Temperature=-55°C, Package Quantity=1, Supplier Part Number 1=478-7870-1-ND, Temperature coefficient=30ppm/°C, Tolerance=5%, Voltage=50V, Capacitance=10pF, Case/Package=0402, Category="Ceramic Capacitors", ComponentLink1Description=https://datasheet.ciiva.com/11788/0900766b80def0e2-11788539.pdf?src-supplier=RSComponents, ComponentLink1URL=https://datasheet.ciiva.com/11788/0900766b80def0e2-11788539.pdf?src-supplier=RSComponents, ComponentLink2Description=https://datasheet.ciiva.com/2990/ccog-2990165.pdf?src-supplier=Avnet, ComponentLink2URL=https://datasheet.ciiva.com/2990/ccog-2990165.pdf?src-supplier=Avnet, ComponentLink3Description=https://datasheet.ciiva.com/16623/ccog-16623350.pdf?src-supplier=Avnet+Europe, ComponentLink3URL=https://datasheet.ciiva.com/16623/ccog-16623350.pdf?src-supplier=Avnet+Europe, ComponentLink4Description=https://datasheet.ciiva.com/14906/ccog-14906265.pdf?src-supplier=Digi-Key, ComponentLink4URL=https://datasheet.ciiva.com/14906/ccog-14906265.pdf?src-supplier=Digi-Key, ComponentLink5Description=https://datasheet.ciiva.com/206/ccog-206459.pdf?src-supplier=Digi-Key, ComponentLink5URL=https://datasheet.ciiva.com/206/ccog-206459.pdf?src-supplier=Digi-Key, ComponentLink6Description=https://datasheet.ciiva.com/14906/ccog-14906267.pdf?src-supplier=Digi-Key, ComponentLink6URL=https://datasheet.ciiva.com/14906/ccog-14906267.pdf?src-supplier=Digi-Key, ComponentLink7Description=https://datasheet.ciiva.com/1123/ccog-1123468.pdf?src-supplier=Element14, ComponentLink7URL=https://datasheet.ciiva.com/1123/ccog-1123468.pdf?src-supplier=Element14, ComponentLink8Description=https://datasheet.ciiva.com/1123/ccog-1123469.pdf?src-supplier=Element14, ComponentLink8URL=https://datasheet.ciiva.com/1123/ccog-1123469.pdf?src-supplier=Element14, Construction=Flat, Contact Plating=Tin,Matte, Depth=0.5mm, Height=0.56mm, Lead Free="Lead Free", Length=1mm, Mount="Surface Mount", Number of Pins=2, Packaging="Tape and Reel", Part Number=04025A100DAT2A, Pricing 1="1=0.30000, 10=0.20700, 50=0.13800, 100=0.11730, 500=0.08280, 1000=0.07245, 2500=0.06900, 5000=0.06382 (USD)", Radiation Hardening=No, REACH SVHC="No SVHC", RoHS=Yes, RoHS Compliant=Yes, Series=-, Stock 1=172687, Supplier 1=Digi-Key, Termination=SMD/SMT, Thickness=0.022inch, Voltage Rating=50V, Voltage Rating (DC)=50V, Width=0.02inch
C15: library part CMP-1037-04985-1, "CAP 22uF 6.3V ±10% 1206 (3216 Metric) Thickness 1.9mm SMD", Case Code (Imperial)=1206, Case Code (Metric)=3216, Dielectric=X7R, Manufacturer="Kyocera AVX", Manufacturer Part Number=12066C226KAT2A, Max Operating Temperature=125°C, Min Operating Temperature=-55°C, Package Quantity=2500, Rated Voltage="6.3 V", Supplier Part Number 1=478-5997-1-ND, Tolerance=Â±10%, Voltage=6.3V, Capacitance=22uF, Case-EIA=1206, Case-Metric=3216, Case/Package=1206, Category="Ceramic Capacitors", ComponentLink1Description=https://datasheet.ciiva.com/11786/0900766b80dc2409-11786266.pdf?src-supplier=RSComponents, ComponentLink1URL=https://datasheet.ciiva.com/11786/0900766b80dc2409-11786266.pdf?src-supplier=RSComponents, ComponentLink2Description=https://datasheet.ciiva.com/16315/cx7r-16315655.pdf?src-supplier=Future+Electronics, ComponentLink2URL=https://datasheet.ciiva.com/16315/cx7r-16315655.pdf?src-supplier=Future+Electronics, ComponentLink3Description=https://datasheet.ciiva.com/154/cx7r-154924.pdf?src-supplier=Digi-Key, ComponentLink3URL=https://datasheet.ciiva.com/154/cx7r-154924.pdf?src-supplier=Digi-Key, ComponentLink4Description=https://datasheet.ciiva.com/154/cx7r-154925.pdf?src-supplier=Digi-Key, ComponentLink4URL=https://datasheet.ciiva.com/154/cx7r-154925.pdf?src-supplier=Digi-Key, ComponentLink5Description=https://datasheet.ciiva.com/154/cx7r-154926.pdf?src-supplier=Digi-Key, ComponentLink5URL=https://datasheet.ciiva.com/154/cx7r-154926.pdf?src-supplier=Digi-Key, Contact Plating=Tin,Matte, Depth=1.6mm, Dissipation Factor=5%, Height=1.78mm, Lead Free="Lead Free", Length=3.2mm, Max Thickness="1.9 mm", Mount="Surface Mount", Number of Pins=2, Packaging="Tape and Reel", Pricing 1="1=0.81000, 10=0.57100, 100=0.37570, 500=0.27830, 1000=0.23656 (USD)", Radiation Hardening=No, REACH SVHC="No SVHC", RoHS=Yes, Stock 1=4915, Supplier 1=Digi-Key, Technology=SMT, Termination=SMD/SMT, Thickness=0.07inch, Voltage Rating=6.3V, Voltage Rating (DC)=6.3V, Width=1.6mm
C16: library part CMP-1034-00812-2, "Cap Ceramic 15pF 50V C0G 1% SMD 0402 125C Paper T/R", Case Code (Imperial)=0402, Case Code (Metric)=1005, Dielectric=C0G, Dielectric Material=Ceramic, Manufacturer="AVX Interconnect / Elco", Manufacturer Part Number=04025A150FAT2A, Max Operating Temperature=125°C, Min Operating Temperature=-55°C, Package Quantity=1, Supplier Part Number 1=478-5126-1-ND, Tolerance=1%, Voltage=50V, Capacitance=15pF, Case/Package=0402, Category="Ceramic Capacitors", ComponentLink1Description=https://datasheet.ciiva.com/26927/getdatasheetpartid-379176-26927300.pdf?src-supplier=Verical, ComponentLink1URL=https://datasheet.ciiva.com/26927/getdatasheetpartid-379176-26927300.pdf?src-supplier=Verical, ComponentLink2Description=https://datasheet.ciiva.com/157/ccog-157986.pdf?src-supplier=Digi-Key, ComponentLink2URL=https://datasheet.ciiva.com/157/ccog-157986.pdf?src-supplier=Digi-Key, ComponentLink3Description=https://datasheet.ciiva.com/157/ccog-157987.pdf?src-supplier=Digi-Key, ComponentLink3URL=https://datasheet.ciiva.com/157/ccog-157987.pdf?src-supplier=Digi-Key, ComponentLink4Description=https://datasheet.ciiva.com/157/ccog-157988.pdf?src-supplier=Digi-Key, ComponentLink4URL=https://datasheet.ciiva.com/157/ccog-157988.pdf?src-supplier=Digi-Key, ComponentLink5Description=https://datasheet.ciiva.com/14603/70001039-14603477.pdf?src-supplier=Allied+Electronics, ComponentLink5URL=https://datasheet.ciiva.com/14603/70001039-14603477.pdf?src-supplier=Allied+Electronics, ComponentLink6Description=https://datasheet.ciiva.com/28453/1796416-28453769.pdf?src-supplier=Element14, ComponentLink6URL=https://datasheet.ciiva.com/28453/1796416-28453769.pdf?src-supplier=Element14, ComponentLink7Description=https://datasheet.ciiva.com/22619/1796416-22619722.pdf?src-supplier=Element14, ComponentLink7URL=https://datasheet.ciiva.com/22619/1796416-22619722.pdf?src-supplier=Element14, ComponentLink8Description=https://datasheet.ciiva.com/11568/ccog-11568587.pdf?src-supplier=Avnet, ComponentLink8URL=https://datasheet.ciiva.com/11568/ccog-11568587.pdf?src-supplier=Avnet, Construction=Flat, Depth=0.5mm, Height=0.56mm, Lead Free="Lead Free", Length=1mm, Mount="Surface Mount,PCB", Number of Pins=2, Packaging="Tape and Reel", Part Number=04025A150FAT2A, Pricing 1="1=0.57000, 10=0.40100, 50=0.30300, 100=0.26390, 500=0.19550, 1000=0.16618, 2500=0.15640, 5000=0.14662 (USD)", Radiation Hardening=No, REACH SVHC="No SVHC", RoHS=Yes, RoHS Compliant=Yes, Series=-, Stock 1=101927, Supplier 1=Digi-Key, Termination=SMD/SMT, Thickness=0.022inch, Voltage Rating=50V, Voltage Rating (DC)=50V, Width=0.02inch
C17: library part CMP-2008-02925-1, Case Code (Imperial)=0402, Case Code (Metric)=1005, Dielectric=X7R, Manufacturer="AVX Interconnect / Elco", Manufacturer Part Number=04023C103JAT2A, Max Operating Temperature=125°C, Min Operating Temperature=-55°C, Package Quantity=1, Supplier Part Number 1=478-7867-1-ND, Tolerance=5%, Voltage Rating=25V, Capacitance=10nF, Case/Package=0402, Category="Ceramic Capacitors", ComponentLink1Description=https://datasheet.ciiva.com/11499/cx7r-11499815.pdf?src-supplier=Avnet, ComponentLink1URL=https://datasheet.ciiva.com/11499/cx7r-11499815.pdf?src-supplier=Avnet, ComponentLink2Description=https://datasheet.ciiva.com/5424/cx7r-218113-5424201.pdf?src-supplier=Mouser, ComponentLink2URL=https://datasheet.ciiva.com/5424/cx7r-218113-5424201.pdf?src-supplier=Mouser, ComponentLink3Description=https://datasheet.ciiva.com/7614/cx7r-7614730.pdf?src-supplier=Digi-Key, ComponentLink3URL=https://datasheet.ciiva.com/7614/cx7r-7614730.pdf?src-supplier=Digi-Key, ComponentLink4Description=https://datasheet.ciiva.com/208/cx7r-208205.pdf?src-supplier=Digi-Key, ComponentLink4URL=https://datasheet.ciiva.com/208/cx7r-208205.pdf?src-supplier=Digi-Key, ComponentLink5Description=https://datasheet.ciiva.com/14906/cx7r-14906237.pdf?src-supplier=Digi-Key, ComponentLink5URL=https://datasheet.ciiva.com/14906/cx7r-14906237.pdf?src-supplier=Digi-Key, ComponentLink6Description=https://datasheet.ciiva.com/16397/cx7r-16397645.pdf?src-supplier=Future+Electronics, ComponentLink6URL=https://datasheet.ciiva.com/16397/cx7r-16397645.pdf?src-supplier=Future+Electronics, ComponentLink7Description=https://datasheet.ciiva.com/14906/cx7r-14906238.pdf?src-supplier=Digi-Key, ComponentLink7URL=https://datasheet.ciiva.com/14906/cx7r-14906238.pdf?src-supplier=Digi-Key, Construction=Flat, Depth=0.5mm, Lead Free="Lead Free", Length=1mm, Mount="Surface Mount", Number of Pins=2, Packaging="Tape and Reel", Part Number=04023C103JAT2A, Pricing 1="1=0.35000, 10=0.24300, 50=0.16980, 100=0.14560, 500=0.10920, 1000=0.09221, 2500=0.08735, 5000=0.08250 (USD)", Radiation Hardening=No, RoHS=Yes, RoHS Compliant=Yes, Series=-, Stock 1=9321, Supplier 1=Digi-Key, Termination=SMD/SMT, Thickness=0.022inch, Voltage Rating (DC)=25V, Width=0.5mm
C18: library part CMP-2008-02925-1, "0402 10 nF 25 V ±5 % Tolerance X7R Surface Mount Multilayer Ceramic Capacitor", Case Code (Imperial)=0402, Case Code (Metric)=1005, Dielectric=X7R, Manufacturer="AVX Interconnect / Elco", Manufacturer Part Number=04023C103JAT2A, Max Operating Temperature=125°C, Min Operating Temperature=-55°C, Package Quantity=1, Supplier Part Number 1=478-7867-1-ND, Tolerance=5%, Voltage Rating=25V, Capacitance=10nF, Case/Package=0402, Category="Ceramic Capacitors", ComponentLink1Description=https://datasheet.ciiva.com/11499/cx7r-11499815.pdf?src-supplier=Avnet, ComponentLink1URL=https://datasheet.ciiva.com/11499/cx7r-11499815.pdf?src-supplier=Avnet, ComponentLink2Description=https://datasheet.ciiva.com/5424/cx7r-218113-5424201.pdf?src-supplier=Mouser, ComponentLink2URL=https://datasheet.ciiva.com/5424/cx7r-218113-5424201.pdf?src-supplier=Mouser, ComponentLink3Description=https://datasheet.ciiva.com/7614/cx7r-7614730.pdf?src-supplier=Digi-Key, ComponentLink3URL=https://datasheet.ciiva.com/7614/cx7r-7614730.pdf?src-supplier=Digi-Key, ComponentLink4Description=https://datasheet.ciiva.com/208/cx7r-208205.pdf?src-supplier=Digi-Key, ComponentLink4URL=https://datasheet.ciiva.com/208/cx7r-208205.pdf?src-supplier=Digi-Key, ComponentLink5Description=https://datasheet.ciiva.com/14906/cx7r-14906237.pdf?src-supplier=Digi-Key, ComponentLink5URL=https://datasheet.ciiva.com/14906/cx7r-14906237.pdf?src-supplier=Digi-Key, ComponentLink6Description=https://datasheet.ciiva.com/16397/cx7r-16397645.pdf?src-supplier=Future+Electronics, ComponentLink6URL=https://datasheet.ciiva.com/16397/cx7r-16397645.pdf?src-supplier=Future+Electronics, ComponentLink7Description=https://datasheet.ciiva.com/14906/cx7r-14906238.pdf?src-supplier=Digi-Key, ComponentLink7URL=https://datasheet.ciiva.com/14906/cx7r-14906238.pdf?src-supplier=Digi-Key, Construction=Flat, Depth=0.5mm, Lead Free="Lead Free", Length=1mm, Mount="Surface Mount", Number of Pins=2, Packaging="Tape and Reel", Part Number=04023C103JAT2A, Pricing 1="1=0.35000, 10=0.24300, 50=0.16980, 100=0.14560, 500=0.10920, 1000=0.09221, 2500=0.08735, 5000=0.08250 (USD)", Radiation Hardening=No, RoHS=Yes, RoHS Compliant=Yes, Series=-, Stock 1=9159, Supplier 1=Digi-Key, Termination=SMD/SMT, Thickness=0.022inch, Voltage Rating (DC)=25V, Width=0.5mm
C19: library part CMP-1036-04761-2, Case Code (Imperial)=0805, Case Code (Metric)=2012, Dielectric=X7R, Manufacturer=Murata, Manufacturer Part Number=GRM21BR71H105KA12L, Max Operating Temperature=125°C, Min Operating Temperature=-55°C, Package Quantity=1, Supplier Part Number 1=24R6342, Tolerance=10%, Voltage=50V, Capacitance=1uF, Case/Package=0805, Category="Ceramic Capacitors", ComponentLink1Description=https://datasheet.ciiva.com/28659/1684872-28659460.pdf?src-supplier=Element14, ComponentLink1URL=https://datasheet.ciiva.com/28659/1684872-28659460.pdf?src-supplier=Element14, ComponentLink2Description=https://datasheet.ciiva.com/22774/1747475-22774409.pdf?src-supplier=Farnell, ComponentLink2URL=https://datasheet.ciiva.com/22774/1747475-22774409.pdf?src-supplier=Farnell, ComponentLink3Description=https://datasheet.ciiva.com/139/grm21br71h105ka12-139467.pdf?src-supplier=Digi-Key, ComponentLink3URL=https://datasheet.ciiva.com/139/grm21br71h105ka12-139467.pdf?src-supplier=Digi-Key, ComponentLink4Description=https://datasheet.ciiva.com/3777/8166grm21br71h105ka1223-3777308.pdf?src-supplier=Arrow+Electronics, ComponentLink4URL=https://datasheet.ciiva.com/3777/8166grm21br71h105ka1223-3777308.pdf?src-supplier=Arrow+Electronics, ComponentLink5Description=https://datasheet.ciiva.com/29202/450841-da-01-de-vs-chip-kond-0805-1-0-uf-10pr-50-0v-x7r-29202833.pdf?src-supplier=Conrad, ComponentLink5URL=https://datasheet.ciiva.com/29202/450841-da-01-de-vs-chip-kond-0805-1-0-uf-10pr-50-0v-x7r-29202833.pdf?src-supplier=Conrad, ComponentLink6Description=https://datasheet.ciiva.com/29199/454791-da-01-en-vs-kondensator-0805-29199539.pdf?src-supplier=Conrad, ComponentLink6URL=https://datasheet.ciiva.com/29199/454791-da-01-en-vs-kondensator-0805-29199539.pdf?src-supplier=Conrad, ComponentLink7Description=https://datasheet.ciiva.com/16199/product-16199127.pdf?src-supplier=Future+Electronics, ComponentLink7URL=https://datasheet.ciiva.com/16199/product-16199127.pdf?src-supplier=Future+Electronics, ComponentLink8Description=https://datasheet.ciiva.com/22774/608985-22774411.pdf?src-supplier=Farnell, ComponentLink8URL=https://datasheet.ciiva.com/22774/608985-22774411.pdf?src-supplier=Farnell, ComponentLink9Description=https://datasheet.ciiva.com/22774/608985-22774412.pdf?src-supplier=Farnell, ComponentLink9URL=https://datasheet.ciiva.com/22774/608985-22774412.pdf?src-supplier=Farnell, Construction=Flat, Depth=1.25mm, Height=1.25mm, Lead Free="Lead Free", Length=2mm, Material=Ceramic, Mount="Surface Mount", Number of Pins=2, Packaging="Tape and Reel", Part Number=GRM21BR71H105KA12L, Radiation Hardening=No, REACH SVHC="No SVHC", RoHS=Yes, RoHS Compliant=Yes, Series=GRM, Supplier 1=Newark, Termination=SMD/SMT, Thickness=0.053inch, Voltage Rating=50V, Voltage Rating (DC)=50V, Width=0.049inch
C21: library part CMP-2006-04093-1, Case Code (Imperial)=0603, Case Code (Metric)=1608, Dielectric=X7R, Dielectric Material=Ceramic, Insulation Resistance=100GR, Manufacturer="AVX Interconnect / Elco", Manufacturer Part Number=06031C332KAT2A, Max Operating Temperature=125°C, Min Operating Temperature=-55°C, Package Quantity=1, Supplier Part Number 1=478-1202-1-ND, Tolerance=10%, Voltage=100V, Capacitance=3.3nF, Case/Package=0603, Category="Ceramic Capacitors", ComponentLink1Description=https://datasheet.ciiva.com/151/cx7r-151090.pdf?src-supplier=Digi-Key, ComponentLink1URL=https://datasheet.ciiva.com/151/cx7r-151090.pdf?src-supplier=Digi-Key, ComponentLink2Description=https://datasheet.ciiva.com/151/cx7r-151091.pdf?src-supplier=Digi-Key, ComponentLink2URL=https://datasheet.ciiva.com/151/cx7r-151091.pdf?src-supplier=Digi-Key, ComponentLink3Description=https://datasheet.ciiva.com/151/cx7r-151092.pdf?src-supplier=Digi-Key, ComponentLink3URL=https://datasheet.ciiva.com/151/cx7r-151092.pdf?src-supplier=Digi-Key, ComponentLink4Description=https://datasheet.ciiva.com/7855/84526-7855208.pdf?src-supplier=Element14, ComponentLink4URL=https://datasheet.ciiva.com/7855/84526-7855208.pdf?src-supplier=Element14, ComponentLink5Description=https://datasheet.ciiva.com/7855/84526-7855209.pdf?src-supplier=Element14, ComponentLink5URL=https://datasheet.ciiva.com/7855/84526-7855209.pdf?src-supplier=Element14, ComponentLink6Description=https://datasheet.ciiva.com/14591/70001075-14591801.pdf?src-supplier=Allied+Electronics, ComponentLink6URL=https://datasheet.ciiva.com/14591/70001075-14591801.pdf?src-supplier=Allied+Electronics, ComponentLink7Description=https://datasheet.ciiva.com/16327/cx7r-16327243.pdf?src-supplier=Future+Electronics, ComponentLink7URL=https://datasheet.ciiva.com/16327/cx7r-16327243.pdf?src-supplier=Future+Electronics, ComponentLink8Description=https://datasheet.ciiva.com/2987/cx7r-2987741.pdf?src-supplier=Avnet, ComponentLink8URL=https://datasheet.ciiva.com/2987/cx7r-2987741.pdf?src-supplier=Avnet, ComponentLink9Description=https://datasheet.ciiva.com/5414/cx7r-218113-5414158.pdf?src-supplier=Mouser, ComponentLink9URL=https://datasheet.ciiva.com/5414/cx7r-218113-5414158.pdf?src-supplier=Mouser, Construction=Flat, Contact Plating=Tin,Matte, Depth=0.81mm, Dissipation Factor=2.5%, Height=0.9mm, Lead Free="Lead Free", Length=1.6mm, Mount="Surface Mount,PCB", Number of Pins=2, Packaging="Tape and Reel", Part Number=06031C332KAT2A, Pricing 1="1=0.12000, 10=0.08500, 50=0.04840, 100=0.04000, 500=0.02806, 1000=0.02323 (USD)", Radiation Hardening=No, REACH SVHC="No SVHC", RoHS=Yes, RoHS Compliant=Yes, Series=-, Stock 1=8115, Supplier 1=Digi-Key, Termination=SMD/SMT, Thickness=0.035inch, Voltage Rating=100V, Voltage Rating (DC)=100V, Width=0.032inch
J1: "Connector", Manufacturer_Name="Wurth Elektronik", Mouser Part Number=710-61301011021, Datasheet Link=http://katalog.we-online.de/em/datasheet/6130xx11021.pdf, Height=2.54mm, Manufacturer_Part_Number=61301011021, Mouser Price/Stock=https://www.mouser.co.uk/ProductDetail/Wurth-Elektronik/61301011021/?qs=ZtY9WdtwX54YO5vJhQZSew%3D%3D
L1: "SMD EMI Suppression Ferrite Bead WE-CBF, Z = 300 Ohm", Case Code (Imperial)=0603, Case Code (Metric)=1608, Case/Package=SMD/SMT, Current Rating=2A, DC Resistance (DCR)=150mR, Inductance=18nH, Manufacturer="Wurth Electronics", Max Operating Temperature=125°C, Min Operating Temperature=-55°C, Package Quantity=1, Supplier Part Number 1=732-1592-1-ND, Test Frequency=100MHz, Tolerance=25%, Category="Ferrite Beads and Chips", ComponentLink1Description="Manufacturer Link", ComponentLink1URL=http://www.we-online.com, ComponentLink2Description=Datasheet, ComponentLink2URL=http://www.we-online.de/katalog/media/pdf/742792641.pdf, ComponentLink3Description=https://datasheet.ciiva.com/1013/742792641-1013888.pdf?src-supplier=Digi-Key, ComponentLink3URL=https://datasheet.ciiva.com/1013/742792641-1013888.pdf?src-supplier=Digi-Key, ComponentLink4Description=https://datasheet.ciiva.com/4940/742792641-72209-4940450.pdf?src-supplier=Mouser, ComponentLink4URL=https://datasheet.ciiva.com/4940/742792641-72209-4940450.pdf?src-supplier=Mouser, ComponentLink5Description=https://datasheet.ciiva.com/1466/1705830-1466501.pdf?src-supplier=Element14, ComponentLink5URL=https://datasheet.ciiva.com/1466/1705830-1466501.pdf?src-supplier=Element14, ComponentLink6Description=https://datasheet.ciiva.com/11800/0900766b80d2e072-11800409.pdf?src-supplier=RSComponents, ComponentLink6URL=https://datasheet.ciiva.com/11800/0900766b80d2e072-11800409.pdf?src-supplier=RSComponents, ComponentLink7Description=https://datasheet.ciiva.com/1013/742792641-1013889.pdf?src-supplier=Digi-Key, ComponentLink7URL=https://datasheet.ciiva.com/1013/742792641-1013889.pdf?src-supplier=Digi-Key, ComponentLink8Description=https://datasheet.ciiva.com/1466/1705830-1466502.pdf?src-supplier=Element14, ComponentLink8URL=https://datasheet.ciiva.com/1466/1705830-1466502.pdf?src-supplier=Element14, Core Material=Ferrite, DatasheetVersion=Dec-2005, Depth=0.8mm, Height=0.8mm, Impedance="300 Ohm", Lead Free="Lead Free", Length=1.6mm, Manufacturer Part Number=742792641, Material=Ferrite, Max Current Rating=2A, Max DC Current=2A, Mount="Surface Mount", Number of Lines=1, PackageDescription="Chip Inductor, 2-Leads, Body 1.6 x 0.8 mm", PackageReference=SMD-0603, PackageVersion=2009, Packaging="Tape and Reel", Pricing 1="1=0.17000, 50=0.16800, 100=0.15500, 500=0.14800, 1000=0.14100, 2000=0.13400 (USD)", REACH SVHC=Unknown, RoHS=Yes, RoHS Compliant=Yes, Series=WE-CBF, Stock 1=74138, Supplier 1=Digi-Key, Termination=SMD/SMT, Weight=0.000141oz, Width=0.8mm